# Altium PCB pcb big.PcbDoc (part 1 of 5)
Units mil, origin at the board's own origin, x right, y up, seen from the top; angles counter-clockwise.
Board outline 4068 x 10796 mil, 6 copper layers (TopLayer, MidLayer1, MidLayer2, MidLayer3, MidLayer4, BottomLayer); 521 components, 260 nets, 1284 pads, 1180 vias.
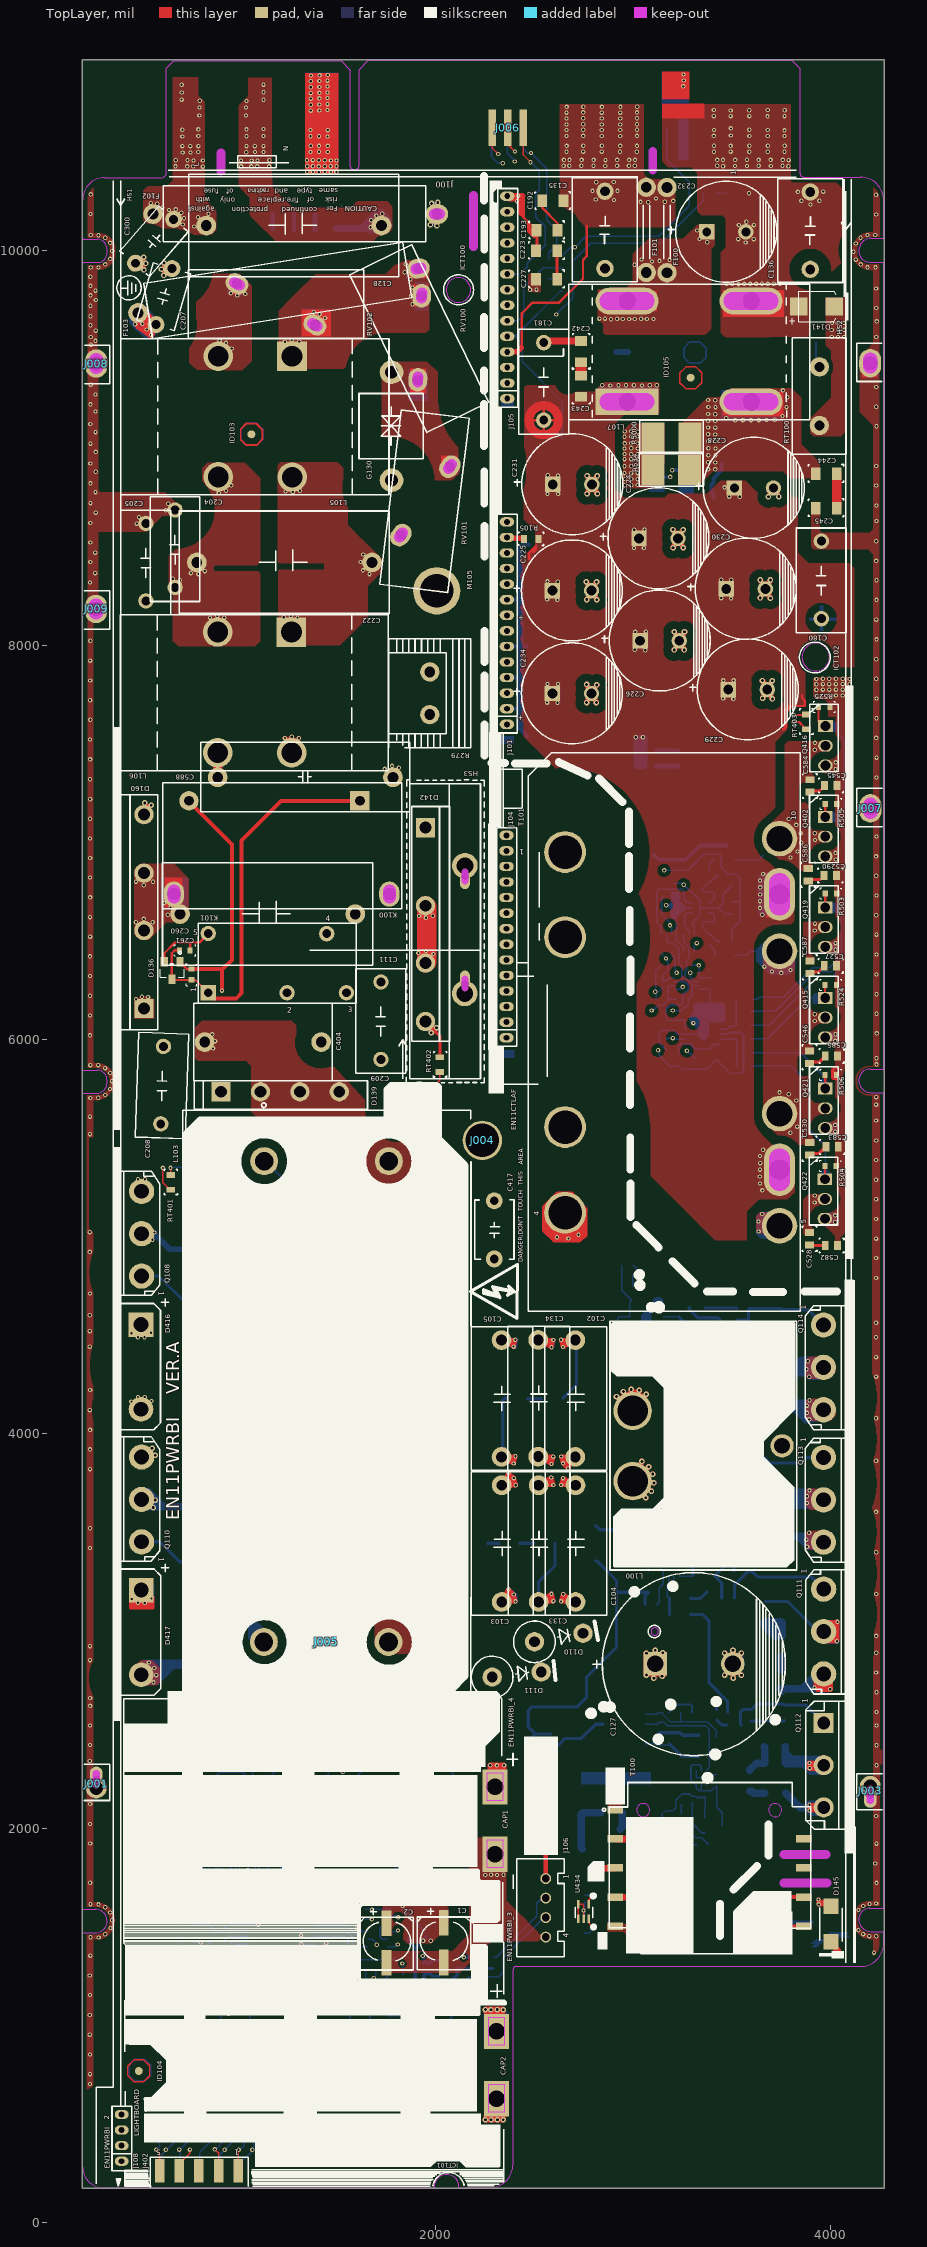
[diagram p0: TopLayer view]
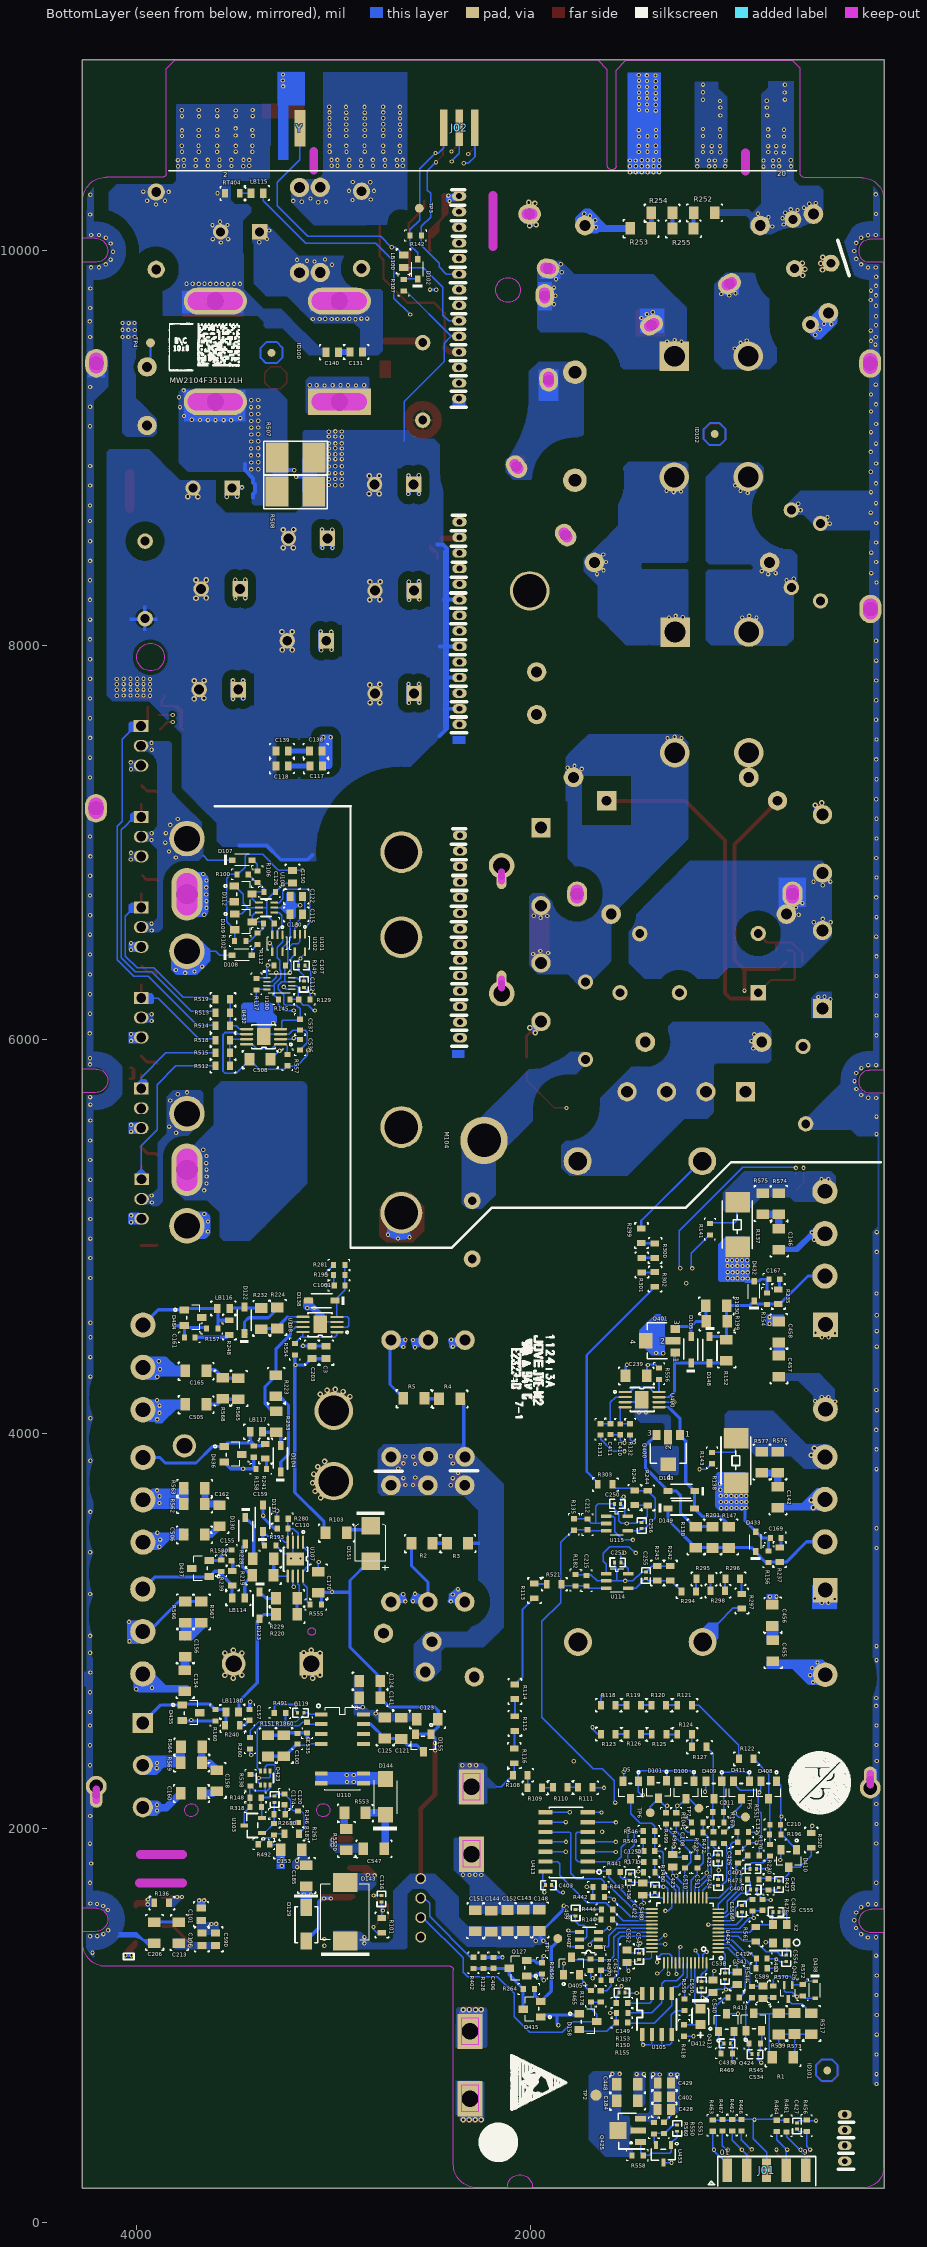
[diagram p1: BottomLayer view, seen from below]
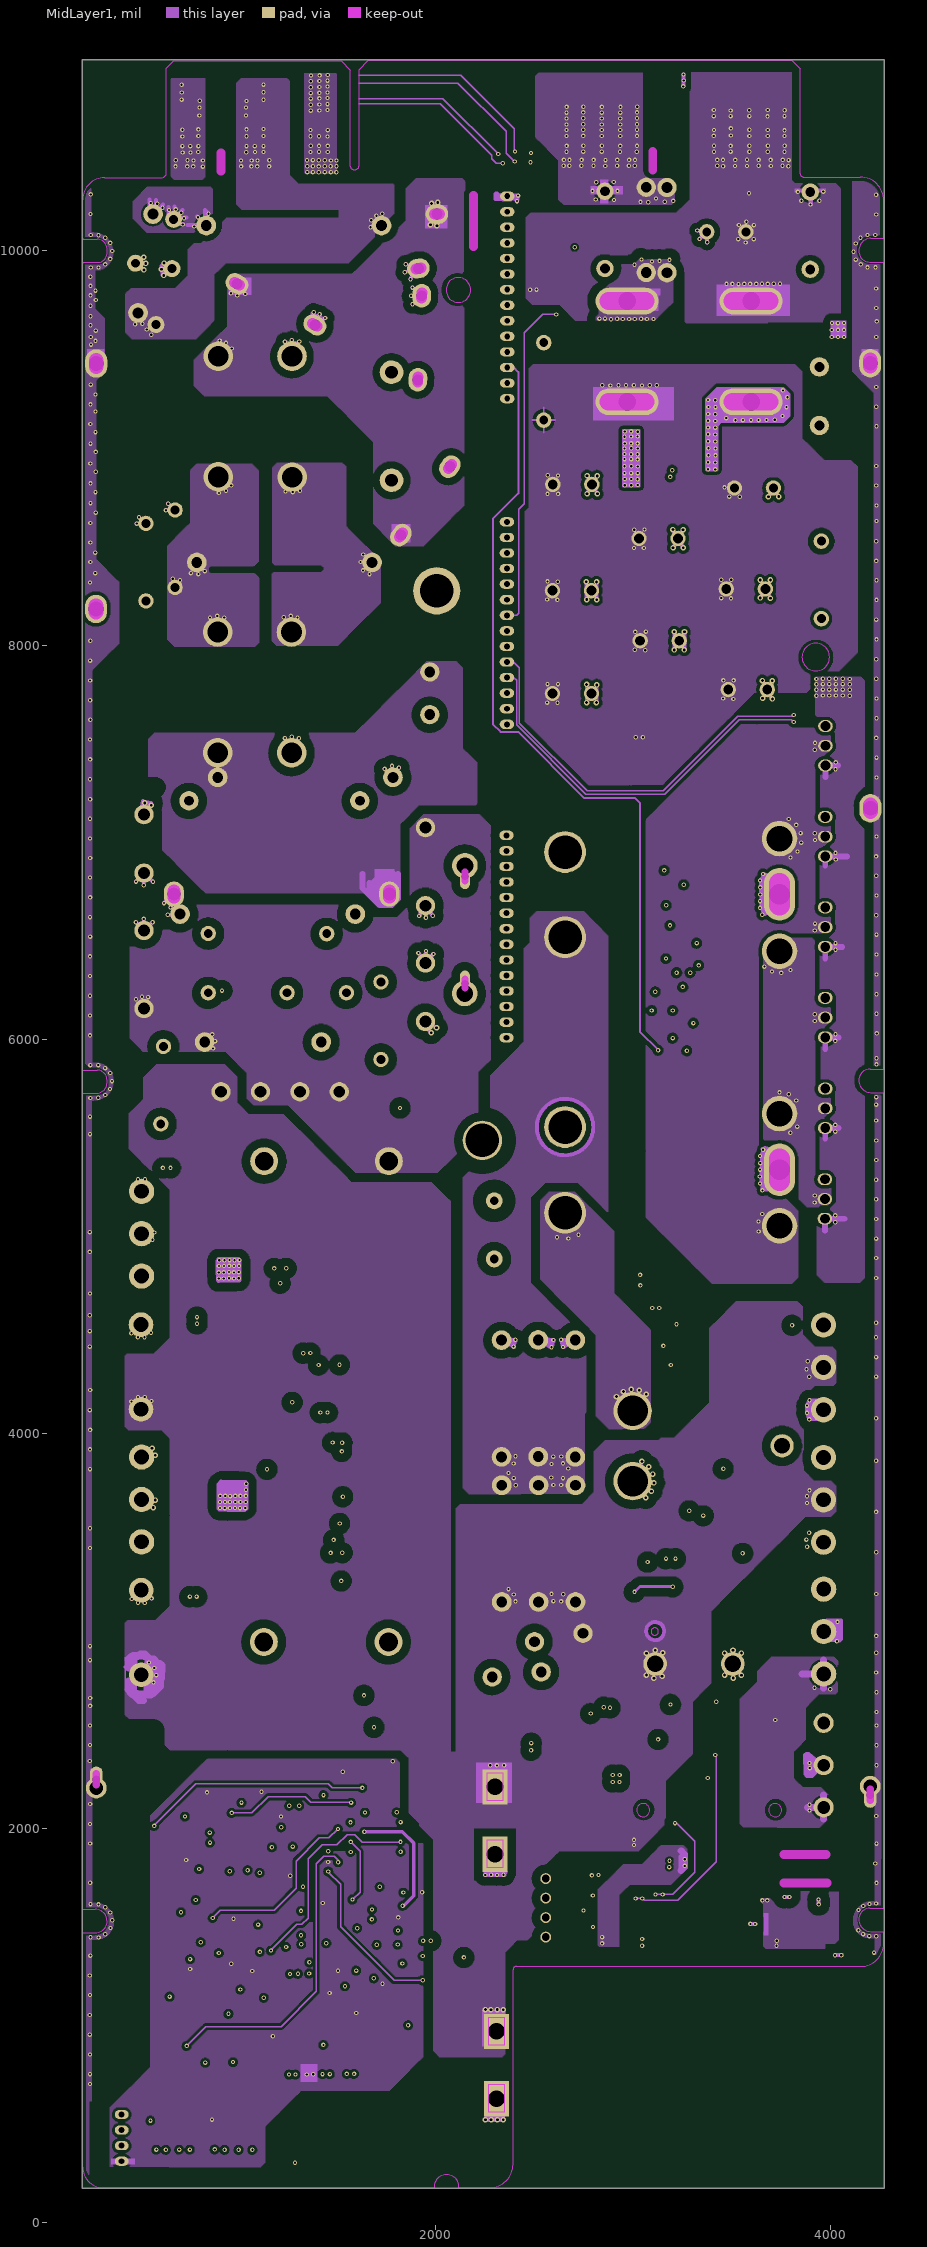
[diagram p2: MidLayer1]
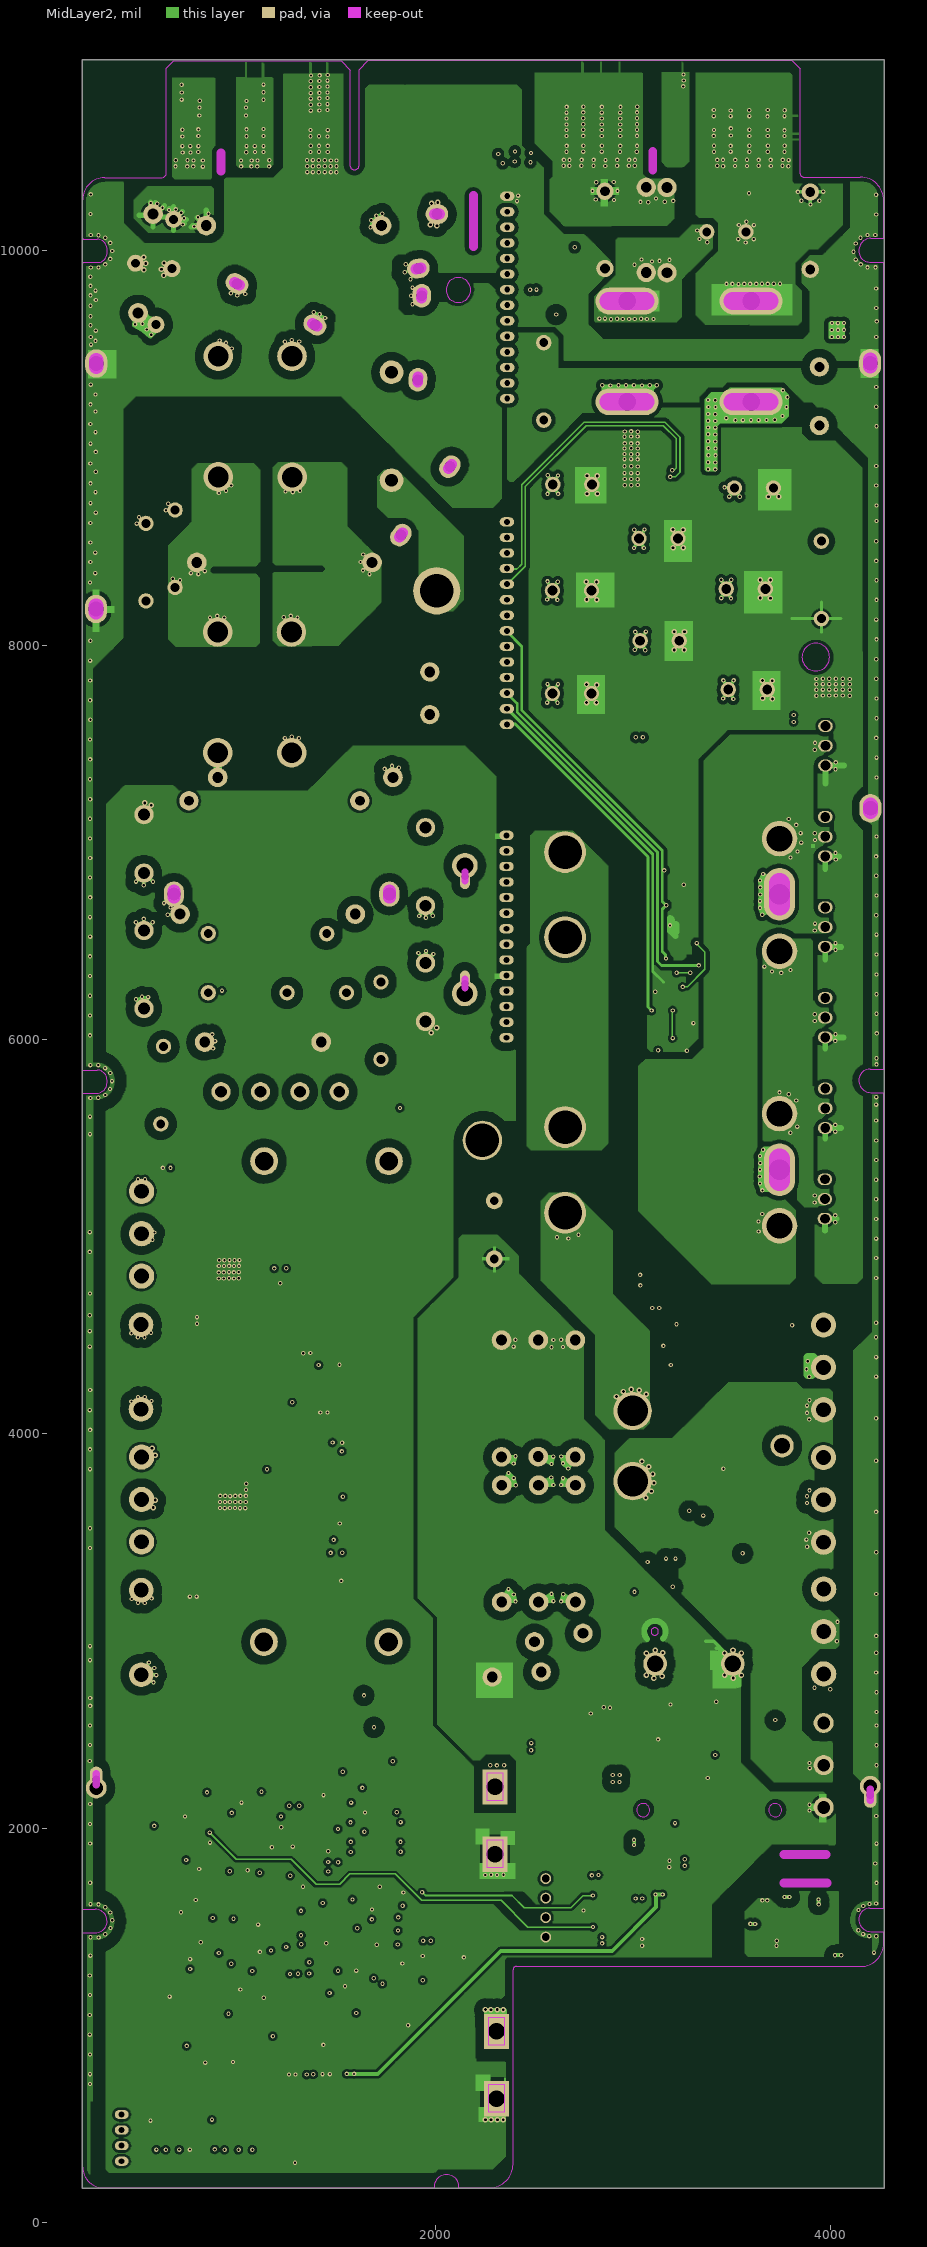
[diagram p3: MidLayer2]
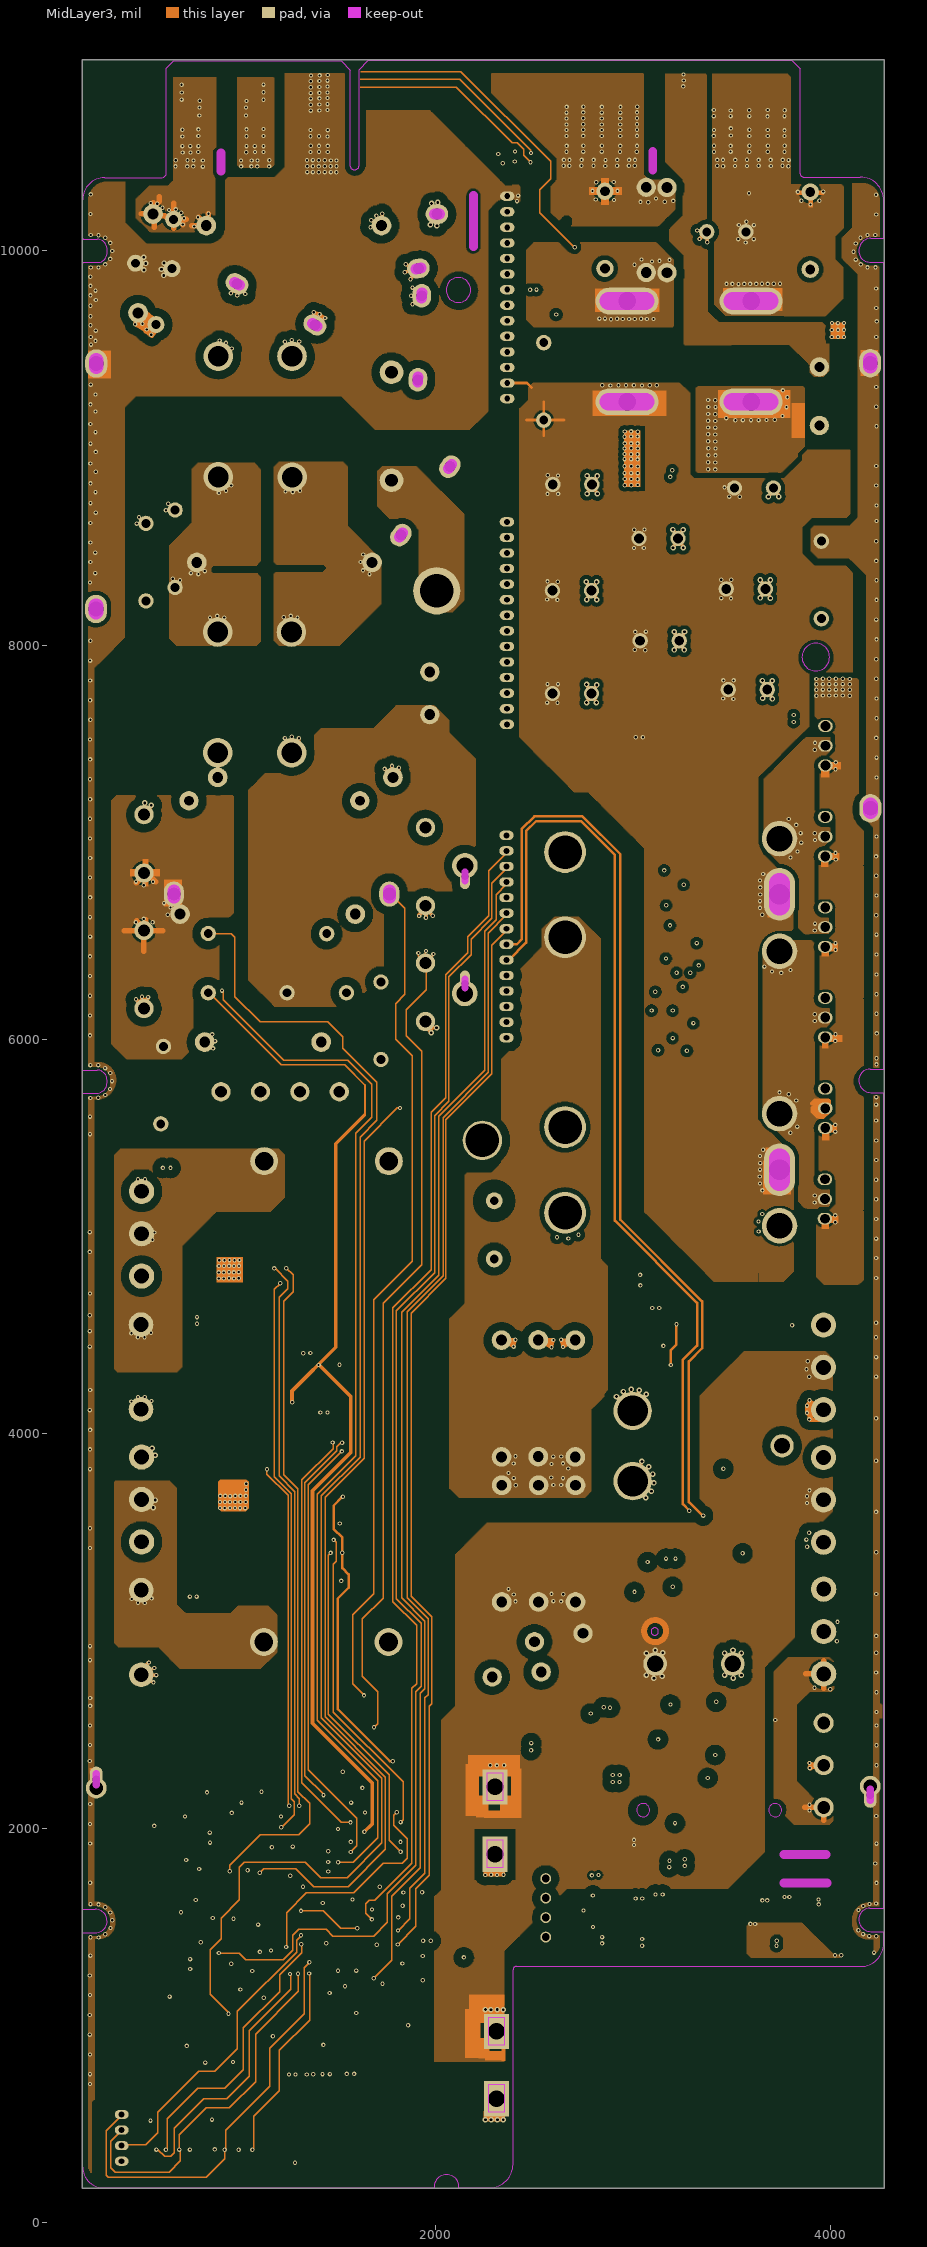
[diagram p4: MidLayer3]
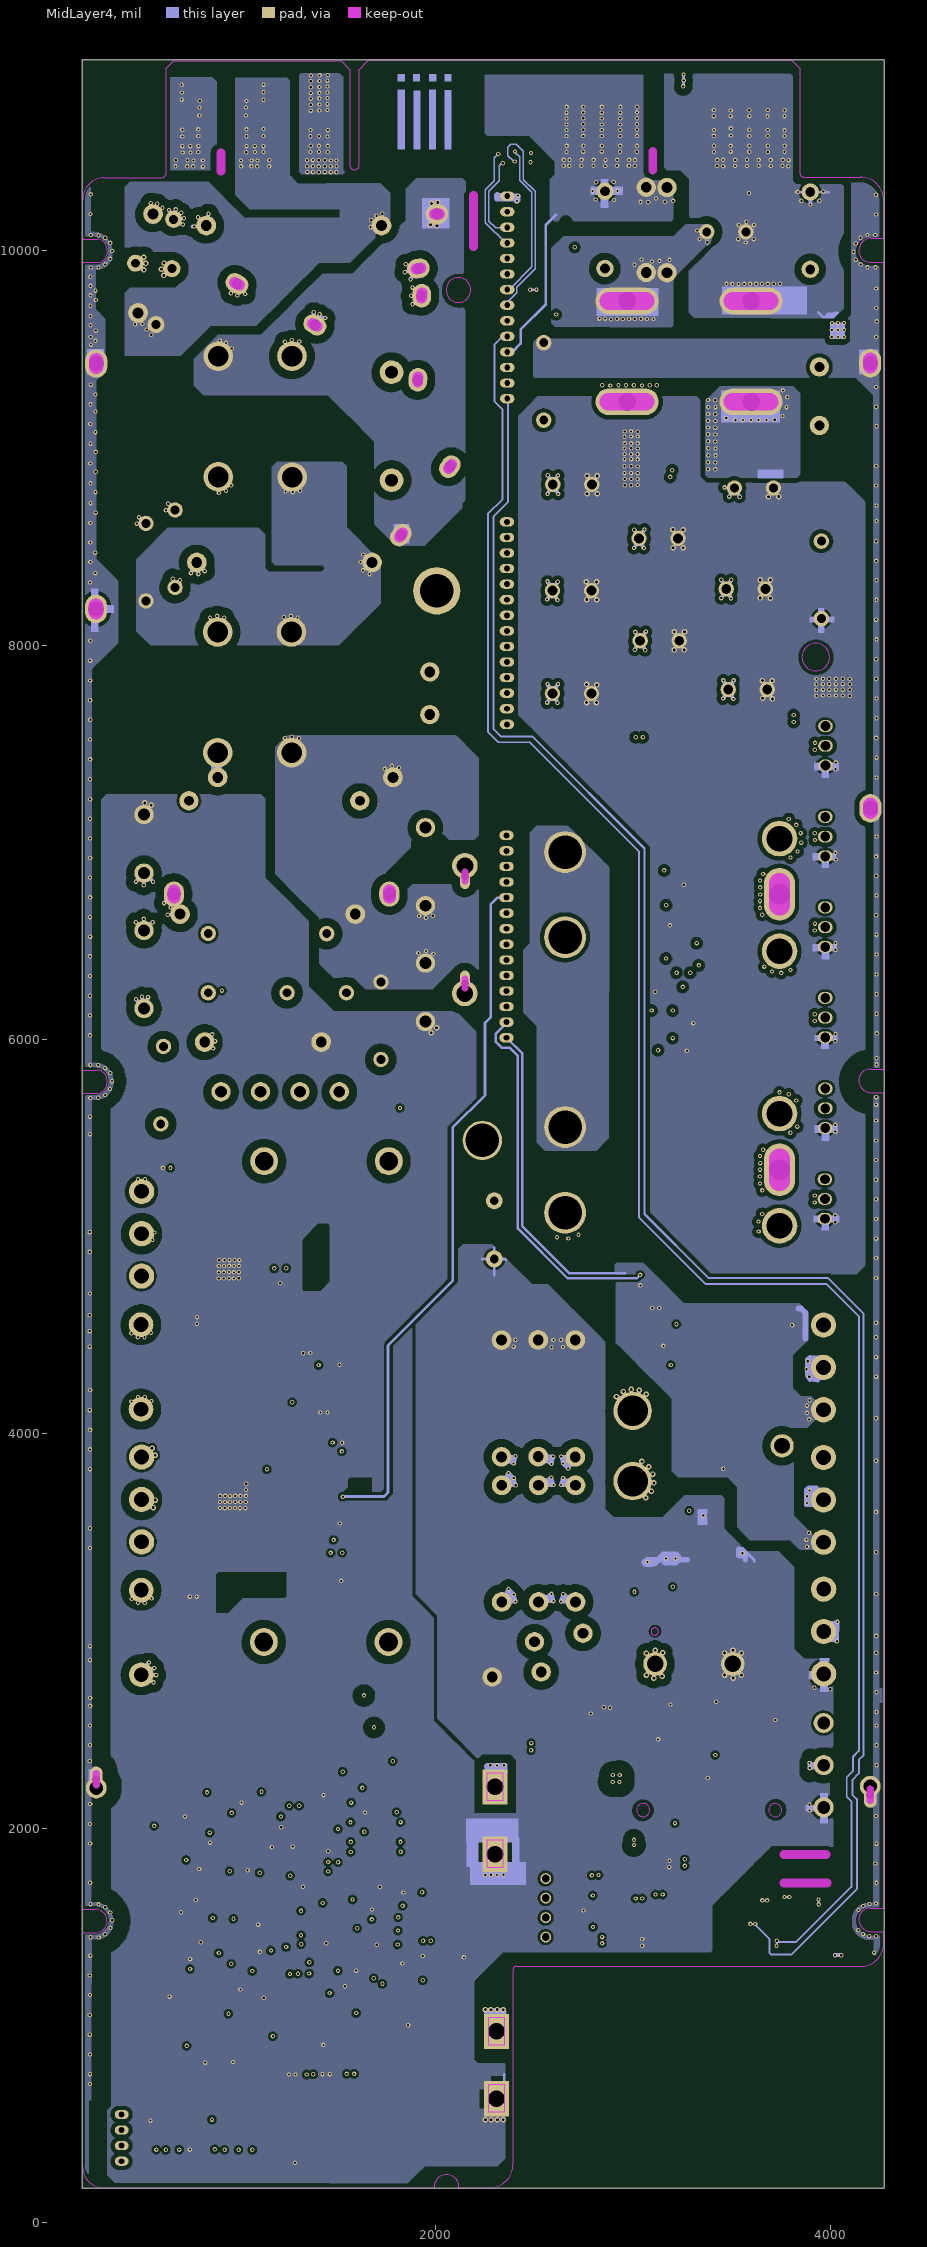
[diagram p5: MidLayer4]

## Layer stack, top to bottom
TopSolder: solder mask 0.4, Solder Resist, Dk 3.5
TopLayer: signal copper 1.4
Dielectric1: core 12.6, FR-4, Dk 4.8
MidLayer1: signal copper 1.4
Dielectric2: prepreg 12.6, FR-4, Dk 4.8
MidLayer2: signal copper 1.4
Dielectric3: core 12.6, FR-4, Dk 4.8
MidLayer3: signal copper 1.4
Dielectric4: prepreg 12.6, FR-4, Dk 4.8
MidLayer4: signal copper 1.4
Dielectric5: core 12.6, FR-4, Dk 4.8
BottomLayer: signal copper 1.4
BottomSolder: solder mask 0.4, Solder Resist, Dk 3.5

## Board outline
205.5,173.5 4273.5,173.5 4273.5,10969.5 205.5,10969.5

## Design rules (kind name [scope] priority, off if disabled: settings)
Clearance Clearance_4 [InNet('C') vs (InPoly)] p1: gap=24 ignorepadtopadclearanceinfootprint=FALSE
Clearance Clearance_3 [InNet('B') vs (InPoly)] p2: gap=12 ignorepadtopadclearanceinfootprint=FALSE
Clearance Clearance_5 [(IsVia) vs (InPoly)] p3 off: gap=12 ignorepadtopadclearanceinfootprint=FALSE
Clearance Clearance_1 [(InPoly) vs (IsKeepOut)] p4: gap=1 ignorepadtopadclearanceinfootprint=FALSE
Clearance [All] p5: gap=20 ignorepadtopadclearanceinfootprint=FALSE
FabricationTestPointUsage TestPointUsage [All] p1: valid=0 allowmultiple=FALSE
FabricationTestpoint Testpoint [All] p1: side=3 testpointundercomponent=TRUE minsize=40 maxsize=100 preferedsize=60 minholesize=20 maxholesize=40 preferedholesize=32 testpointgrid=1 allowsidetop=TRUE allowsidebottom=TRUE usegrid=TRUE gridtolerance=0.01
PolygonConnect [All] p1: connectstyle=Direct reliefconductorwidth=10 reliefentries=4 polygonreliefangle="90 Angle" airgapwidth=10
RoutingLayers [All] p1: top layer_v5=TRUE mid layer 1_v5=FALSE mid layer 2_v5=FALSE mid layer 3_v5=FALSE mid layer 4_v5=FALSE bottom layer_v5=TRUE
RoutingVias [All] p1: holewidth=28 width=50 viastyle="Through Hole" minholewidth=28 minwidth=50 maxholewidth=28 maxwidth=50
SolderMaskExpansion [All] p1: expansion=1 istentingtop=FALSE
Width [All] p1: maxlimit=10 minlimit=10 preferedwidth=10
27 further rules are at their usual default settings.

## Components (designator, comment, footprint, x,y, rotation, side; value= is the part's Value field where it differs from the comment)
C1 "100UF 16V 6.3*5.4MM" SOP2W 2040,1520 r0 top
C2 "100UF 16V 6.3*5.4MM" SOP2W 1750,1518 r0 top
C3 "1UF" 0805W 3037,4444 r270 bottom
C53B "100NF" 0402Q 1014,1265 r0 bottom
C100 "100P" 0603E 3183,2480 r270 bottom
C101 "1UF" 0805W 3671,1595 r270 bottom
C102 "MKP21 104J630" DIP2E 2707,4475 r0 top
C103 "MKP21 104J630" DIP2E 2334,3739 r0 top
C104 "MKP21 104J630" DIP2E 2708,3739 r0 top
C105 "MKP21 104J630" DIP2E 2333,4475 r0 top
C106 "1UF" 0805W 3667,1467 r270 bottom
C107 "100NF" 0402Q 3145,6376 r90 bottom
C108 "1UF" 0603E 1125,1978 r0 bottom
C110 "39P" 0603E 3231,3519 r0 bottom
C111 "MKP62 305-X2 225M" DIP1Y 702,6636 r0 top
C112 "100NF" 0402Q 3150,6297 r0 bottom
C115 "10UF" 0805W 3157,6635 r0 bottom
C116 "100NF" 0402Q 2757,1658 r0 bottom
C117 "470P" 0805W 3056,7387 r0 bottom
C118 "470P" 0805W 3229,7387 r0 bottom
C119 "10P" 0402Q 3150,2585 r90 bottom
C120 "1UF" 0603E 3249,2172 r270 bottom
C121 "10UF" 1206 2656,2559 r270 bottom
C122 "10UF" 0805W 3156,6725 r0 bottom
C123 "10UF" 1206 2471,2552 r0 bottom
C124 "10UF" 1206 2762,2746 r0 bottom
C125 "10UF" 1206 2739,2561 r270 bottom
C126 "220P" 0603R 3294,6749 r0 bottom
C127 "100UF 475V 22*30MM" DIP2V 3112,2833 r0 top
C128 "MKP62 305-X2 225M" DIP1Y 835,10129 r0 top
C130 "220P" 0603E 3300,6589 r0 bottom
C131 "1UF" 0805W 2852,9488 r0 bottom
C132 "1NF" 0603E 895,1928 r0 bottom
C133 "MKP21 104J630" DIP2E 2521,3739 r0 top
C134 "MKP21 104J630" DIP2E 2519,4476 r0 top
C135 "MKP62 275-X2 224M" DIP2Q 2857,10303 r0 top
C136 "MKP62 275-X2 224M" DIP2Q 3899,10299 r0 top
C138 "1UF" 0805W 3058,7464 r0 bottom
C139 "1UF" 0805W 3229,7464 r0 bottom
C140 "1UF" 0805W 2975,9487 r0 bottom
C141 "10UF" 1206 2762,2662 r0 bottom
C142 "100P" 1206 747,3732 r270 bottom
C143 "10UF" 1206 2036,1585 r270 bottom
C144 "10UF" 1206 2200,1581 r270 bottom
C146 "100P" 1206 740,5040 r270 bottom
C148 "10UF" 1206 1955,1585 r270 bottom
C149 "100NF" 0402Q 1520,1165 r90 bottom
C150 "10UF" 0805W 3207,6857 r270 bottom
C151 "10UF" 1206 2280,1583 r270 bottom
C152 "10UF" 1206 2117,1584 r270 bottom
C153 "10UF" 1206 3160,1891 r0 bottom
C154 "1.5NF" 1206 3754,2801 r270 bottom
C155 "1.5NF" 0603E 3516,3410 r270 bottom
C156 "1.5NF" 1206 3752,2976 r270 bottom
C157 "1.5NF" 0603E 3426,2601 r270 bottom
C158 "1.5NF" 1206 3592,2294 r270 bottom
C159 "1.5NF" 0603E 3339,3822 r0 bottom
C160 "1.5NF" 1206 3668,2177 r0 bottom
C161 "1.5NF" 0603E 3702,4489 r0 bottom
C162 "1.5NF" 1206 3578,3638 r270 bottom
C165 "1.5NF" 1206 3644,4319 r0 bottom
C167 "2.2NF" 0603E 736,4784 r0 bottom
C169 "2.2NF" 0603E 729,3472 r0 bottom
C170 "10UF" 1206 3077,3301 r270 bottom
C174 "1NF" 0402Q 3299,2162 r0 bottom
C180 "MKP62 275-X2 104M" DIP2W 3955,8528 r0 top
C181 "MKP62 275-X2 104M" DIP2W 2547,9535 r0 top
C184 "10UF" 1206 1456,617 r0 bottom
C185 "10UF" 1206 3137,1812 r270 bottom
C192 "1NF" 1206 2540,10254 r0 top
C193 "1NF" 1206 2510,10105 r0 top
C203 "1UF" 0805W 3109,4444 r270 bottom
C204 "MKP63 300-Y2 103M" DIP2W 677,8686 r0 top
C205 "MKP63 300-Y2 103M" DIP2W 529,8618 r0 top
C206 "1NF" 1206 3909,1523 r270 bottom
C207 "102M X1:440V Y2:300V" DIP2T 580,9627 r164 top
C208 "MKP63 300-Y2 103M" DIP2W 618,5965 r358 top
C209 "MKP63 300-Y2 103M" DIP2W 1721,6292 r0 top
C210 "100P" 0603E 732,2017 r0 bottom
C211 "100P" 0603E 1022,2082 r0 bottom
C212 "10NF" 0603E 1711,3567 r270 bottom
C213 "1NF" 1206 3784,1522 r270 bottom
C215 "10NF" 0603E 1716,3282 r270 bottom
C222 "AV R.46 MKP X2 1.5UF 275V" DIP1Y 787,8420 r0 top
C223 "1NF" 1206 2508,10002 r0 top
C224 "680UF 63V 13*30MM" DIP2J 3030,8542 r0 top
C225 "680UF 63V 13*30MM" DIP2J 2591,8277 r0 top
C226 "680UF 63V 13*30MM" DIP2J 3036,8023 r0 top
C227 "1NF" 1206 2508,9857 r0 top
C228 "680UF 63V 13*30MM" DIP2K 3514,8798 r0 top
C229 "680UF 63V 13*30MM" DIP2J 3483,7775 r0 top
C230 "680UF 63V 13*30MM" DIP2J 3473,8286 r0 top
C231 "680UF 63V 13*30MM" DIP2J 2593,8816 r0 top
C232 "470UF 63V 13*25MM" DIP2K 3374,10097 r0 top
C234 "680UF 63V 13*30MM" DIP2J 2591,7755 r0 top
C239 "10UF" 1206 1411,4295 r0 bottom
C242 "3.9NF" 1206 2736,9543 r270 top
C243 "3.9NF" 1206 2736,9367 r270 top
C244 "3.9NF" 1206 3926,8870 r0 top
C245 "3.9NF" 1206 3927,8696 r0 top
C250 "100NF" 0402Q 1543,3645 r90 bottom
C251 "100NF" 0402Q 1541,3348 r90 bottom
C255 "10P" 0402Q 1415,3298 r0 bottom
C256 "10P" 0402Q 1437,3551 r0 bottom
C260 "NC" 0603E 699,6452 r0 top
C261 "NC" 0603E 760,6357 r270 top
C300 "102M X1:440V Y2:300V" DIP2T 476,9938 r139 top
C400 "1NF" 0402Q 853,1688 r90 bottom
C401 "1NF" 0402Q 854,1793 r90 bottom
C402 "10UF" 0805R 1288,637 r0 bottom
C403 "100NF" 0402Q 1893,1711 r90 bottom
C404 "CL21X 155K450P" DIP2A 827,5987 r0 top
C405 "1NF" 0402Q 741,1731 r0 bottom
C406 "NC" 0603E 2188,1343 r270 bottom
C410 "100P" 0603E 1545,4049 r270 bottom
C411 "100P" 0603E 1595,4051 r270 bottom
C412 "100P" 0603E 800,1338 r0 bottom
C417 "102M X1:440V Y2:300V" DIP2T 2296,5182 r0 top
C420 "100NF" 0603E 823,1637 r270 bottom
C422 "10UF" 0805W 1431,1722 r270 bottom
C423 "10UF" 0805W 1279,1866 r270 bottom
C424 "1NF" 0402Q 1049,1740 r0 bottom
C425 "1NF" 0402Q 1050,1864 r0 bottom
C426 "1UF" 0603E 948,1877 r270 bottom
C427 "100NF" 0402Q 649,505 r0 bottom
C428 "10UF" 0805R 1288,573 r0 bottom
C429 "10UF" 0805R 1287,706 r0 bottom
C436 "1NF" 0402Q 1495,1766 r0 bottom
C437 "100P" 0603E 1589,1228 r0 bottom
C448 "10UF" 1206 1456,700 r0 bottom
C454 "10P" 0603E 1643,1333 r270 bottom
C455 "1.5NF" 1206 771,2953 r270 bottom
C456 "1.5NF" 1206 773,3132 r270 bottom
C457 "1.5NF" 1206 742,4397 r270 bottom
C458 "1.5NF" 1206 742,4570 r270 bottom
C459 "100NF" 0402Q 1772,1586 r0 bottom
C505 "1.5NF" 1206 3644,4149 r0 bottom
C506 "1.5NF" 1206 3653,3489 r0 bottom
C508 "10UF" 1206 3319,5900 r0 bottom
C510 "470P" 0603E 1217,1851 r270 bottom
C511 "470P" 0603E 1154,1851 r270 bottom
C527 "470P" 0805W 3970,6374 r0 top
C528 "470P" 0805W 3895,5021 r270 top
C530 "470P" 0805W 3896,5478 r270 top
C534 "1NF" 0402Q 845,853 r90 bottom
C535 "2.2NF" 0603E 3133,2537 r270 bottom
C536 "9.09K" 0603E 3169,6000 r270 bottom
C537 "9.09K" 0603E 3169,6103 r270 bottom
C540 "10UF" 0805W 1074,1229 r270 bottom
C541 "10UF" 0805W 952,1270 r270 bottom
C545 "470P" 0805W 3972,7289 r0 top
C546 "470P" 0805W 3895,5942 r270 top
C547 "1.5NF" 1206 2742,1896 r0 bottom
C549 "100NF" 0402Q 1450,1365 r0 bottom
C550 "100NF" 0402Q 1132,1222 r0 bottom
C551 "100NF" 0402Q 1257,494 r0 bottom
C552 "10UF" 0805W 1511,1381 r270 bottom
C554 "22P" 0402Q 703,1355 r0 bottom
C555 "22P" 0402Q 739,1575 r90 bottom
C582 "470P" 0805W 3975,4955 r0 top
C583 "470P" 0805W 3978,5456 r0 top
C584 "470P" 0805W 3897,7318 r270 top
C585 "470P" 0805W 3975,5917 r0 top
C586 "470P" 0805W 3889,6868 r270 top
C587 "470P" 0805W 3897,6398 r270 top
C588 "MKP62 275-X2 684K" DIP2U 893,7330 r0 top
C589 "NC" 0805W 821,1198 r270 bottom
C590 "1UF" 0805W 3598,1467 r270 bottom
C1001 "39P" 0603E 2942,4752 r0 bottom
C1250 "10NF" 0603E 1370,1884 r0 bottom
C4330 "1NF" 0402Q 987,908 r90 bottom
C5290 "470P" 0805W 3969,6832 r0 top
C5480 "100NF" 0402Q 1370,1704 r0 bottom
C5560 "470NF" 0402Q 928,1607 r0 bottom
CAP1 "390UF 475V 30*45MM" DIP2H 2300,2209 r0 top
CAP2 "390UF 475V 30*45MM" DIP2H 2307,969 r0 top
D5 "A7" SOT-23Q 1452,2237 r180 bottom
D100 "18A" SOT-23Q 1171,2238 r180 bottom
D101 "18A" SOT-23Q 1310,2240 r180 bottom
D102 "JS" SMA2W 2572,9858 r0 bottom
D103 "B3" SMA2T 1167,3710 r270 bottom
D104 "B3" SMA2T 3267,3806 r0 bottom
D105 "B3" SMA2T 1185,4359 r0 bottom
D107 "JS" SMA2W 3513,6910 r90 bottom
D108 "JS" SMA2W 3514,6428 r90 bottom
D109 "A7" SOT-23Q 3501,6637 r90 bottom
D110 "UF5408G" DIP2R 2746,2988 r0 top
D111 "UF5408G" DIP2R 2534,2792 r356 top
D112 "A7" SOT-23Q 3502,6779 r90 bottom
D122 "B3" SMA2T 3450,4508 r0 bottom
D123 "B3" SMA2T 3374,3197 r180 bottom
D129 "SS510A" SMA2E 3138,1597 r0 bottom
D130 "B3" SMA2T 3447,3576 r180 bottom
D136 "A4" SOT-23Q 702,6394 r0 top
D137 "S5" SMA2T 3358,3504 r0 bottom
D138 "S5" SMA2T 2991,4677 r270 bottom
D139 "GBU15K" DIP4E 910,5735 r0 top
D141 "SMBJ58A" SMA2Q 4021,9718 r0 top
D142 "D25SB80" DIP4Y 1947,7075 r0 top
D143 "560JS" SMA2U 2939,1427 r0 bottom
D144 "HF7" SMA2I 2735,2068 r0 bottom
D145 "HF7" SOP2E 4003,1424 r0 top
D148 "NC" SMA2T 1092,4493 r180 bottom
D149 "NC" SMA2T 1303,3622 r90 bottom
D151 "U1J" SMA2Q 2810,3534 r90 bottom
D155 "A4" SOT-23Q 2504,2477 r180 bottom
D158 "A7" SOT-23Q 1753,1058 r90 bottom
D160 "D35SB100" DIP4Y 519,6157 r180 top
D405 "A7" SOT-23Q 1832,1255 r0 bottom
D408 "A7" SOT-23Q 752,2237 r180 bottom
D409 "A7" SOT-23Q 1030,2237 r180 bottom
D410 "A7" SOT-23Q 650,1891 r180 bottom
D411 "A7" SOT-23Q 890,2237 r180 bottom
D412 "G黄绿色" SMA2Y 1137,1083 r0 bottom
D415 "A7" SOT-23Q 1948,1041 r270 bottom
D416 "STTH30L06WH" DIP2G 504,4554 r0 top
D417 "STTH30L06WH" DIP2G 505,3207 r0 top
D432 "JS" SMA2W 865,4674 r0 bottom
D433 "JS" SMA2W 857,3403 r0 bottom
D434 "12M" SOT-23Q 3756,4629 r90 bottom
D435 "12M" SOT-23Q 3767,2625 r90 bottom
D436 "12M" SOT-23Q 3554,3936 r90 bottom
D437 "12M" SOT-23Q 3629,3277 r270 bottom
D438 "NC" SMA2O 556,1224 r0 bottom
F100 "A" DIP2L 3172,10322 r0 top
F101 "A" DIP2L 3067,10323 r0 top
F102 "30A250V" DIP2I 565,10187 r0 top
F103 "30A250V" DIP2I 489,9686 r9 top
G130 "2R1500" DIP2D 1775,9385 r0 top
HS2 "" DIP1Q 4203,9431 r180 top
HS3 "38*9*31MM" DIP4U 2147,6882 r0 top
ID100 "" SOP1Q 3314,9483 r90 bottom
ID101 "" SOP1Q 495,770 r90 bottom
ID102 "" SOP1Q 1066,9072 r90 bottom
ID103 "" SOP1Q 1064,9070 r0 top
ID104 "" SOP1Q 493,768 r0 top
ID105 "" SOP1Q 3292,9357 r0 top
J001 "" DIP1W 277,2203 r0 top
J01 "NC" SOP5W 603,264 r0 bottom
J02 "NC" SOP3W 2441,10624 r180 bottom
J003 "" DIP1W 4203,2212 r180 top
J004 "" DIP1R 2236,5488 r0 top
J005 "" DIP2X 1127,2944 r0 top
J006 "NC" SOP3W 2444,10625 r180 top
J007 "" DIP1Q 4204,7173 r180 top
J008 "" DIP1Q 277,9429 r0 top
J009 "" DIP1Q 276,8184 r0 top
J101 "NC" DIP14Q 2360,7599 r0 top
J104 "NC" DIP14Q 2358,6009 r0 top
J105 "NC" DIP14Q 2362,9251 r0 top
J106 "XH2.54MM" DIP4P 2557,1744 r0 top
J108 "MK" DIP4W 406,310 r0 top
J402 "NC" SOP5Q 998,261 r0 top
K100 "HF161F-W 12-HT(704)" DIP4R 1614,7211 r0 top
K101 "HF33F 012-ZS3" DIP5Q 845,6237 r0 top
L100 "BYQ" DIP3Q 2998,4116 r0 top
L103 "BYQ" DIP2X 1129,5383 r0 top
L105 "2MH" DIP4Q 1270,9466 r0 top
L106 "2MH" DIP4Q 1267,8067 r0 top
L107 "270UH" DIP4I 2970,9235 r0 top
LB100 "1UH" 0805W 2643,9979 r270 bottom
LB114 "0R" 0805W 3450,3167 r0 bottom
LB115 "1UH" 0805W 3356,10293 r0 bottom
LB116 "0R" 0805W 3526,4636 r0 bottom
LB117 "0R" 0805W 3359,4011 r0 bottom
LB1180 "0R" 0805W 3481,2589 r0 bottom
M105 "A" DIP1E 2004,8276 r180 top
Q108 "CRJQ41N65GCF" DIP3E 507,4800 r180 top
Q110 "CRJQ41N65GCF" DIP3E 507,3452 r180 top
Q111 "OSG65R038HZ" DIP3E 3967,3212 r0 top
Q112 "OSG65R038HZ" DIP3W 3967,2533 r0 top
Q113 "OSG65R038HZ" DIP3E 3966,3880 r0 top
Q114 "OSG65R038HZ" DIP3E 3966,4552 r0 top
Q127 "2X" SOT-23Q 2019,1249 r270 bottom
Q400 "NC" SOP4W 1242,3994 r270 bottom
Q401 "NC" SOP4W 1266,4412 r0 bottom
Q402 "P157R5NT" DIP3R 3975,7129 r0 top
Q413 "2X" SOT-23Q 1047,968 r0 bottom
Q415 "P157R5NT" DIP3R 3975,6211 r0 top
Q416 "P157R5NT" DIP3R 3976,7590 r0 top
Q419 "P157R5NT" DIP3R 3975,6670 r0 top
Q421 "P157R5NT" DIP3R 3975,5751 r0 top
Q422 "P157R5NT" DIP3R 3973,5291 r0 top
Q423 "1F" SOP6E 3321,2290 r0 bottom
Q424 "2X" SOT-23Q 908,971 r0 bottom
Q425 "KZ" SOP4E 1442,407 r0 bottom
Q426 "NC" SOT-23R 673,1203 r0 bottom
R1 "NC" 1206 667,837 r0 bottom
R2 "NC" 1206 2497,3445 r0 bottom
R3 "NC" 1206 2317,3445 r0 bottom
R4 "NC" 1206 2357,4178 r0 bottom
R5 "NC" 1206 2538,4180 r0 bottom
R100 "2.49K" 0603R 3432,6838 r0 bottom
R101 "NC" 0805Q 2755,1543 r180 bottom
R102 "2.49K" 0603R 3443,6499 r0 bottom
R103 "1R" 1206 2933,3498 r0 bottom
R104 "1.96K" 0603R 1126,2029 r0 bottom
R105 "43R" 0805Q 2447,8539 r90 top
R106 "100R" 0603R 3386,6855 r270 bottom
R107 "220K" 0603R 2643,9855 r270 bottom
R108 "330K" 0805Q 2015,2269 r270 bottom
R109 "330K" 0805Q 1941,2204 r270 bottom
R110 "330K" 0805Q 1813,2206 r270 bottom
R111 "330K" 0805Q 1685,2206 r270 bottom
R112 "100R" 0603R 3386,6540 r270 bottom
R113 "330K" 0805Q 1981,3240 r180 bottom
R114 "330K" 0805Q 2080,2729 r180 bottom
R115 "330K" 0805Q 2081,2567 r180 bottom
R116 "330K" 0805Q 2083,2403 r180 bottom
R117 "10K" 0603R 3391,6310 r270 bottom
R118 "330K" 0805Q 1569,2624 r270 bottom
R119 "330K" 0805Q 1440,2624 r270 bottom
R120 "330K" 0805Q 1312,2624 r270 bottom
R121 "330K" 0805Q 1182,2624 r270 bottom
R122 "330K" 0805Q 869,2352 r270 bottom
R123 "330K" 0805Q 1569,2477 r270 bottom
R124 "330K" 0805Q 1182,2476 r270 bottom
R125 "330K" 0805Q 1311,2475 r270 bottom
R126 "330K" 0805Q 1439,2476 r270 bottom
R127 "330K" 0805Q 1107,2412 r270 bottom
R128 "10K" 0603R 2239,1345 r270 bottom
R129 "10K" 0603R 3118,6204 r0 bottom
R130 "18R" 1206 1162,3529 r270 bottom
R131 "100R" 0603R 1645,4051 r270 bottom
R132 "100R" 0603R 1495,4051 r270 bottom
R135 "9.09K" 0603R 1780,3569 r270 bottom
R136 "2.2R" 0805Q 3835,1620 r270 bottom
R137 "5MRF" SOP2R 950,5174 r0 bottom
R138 "5MRF" SOP2R 957,3977 r0 bottom
R141 "100R" 0603R 1090,5067 r270 bottom
R142 "NC" 0603R 2553,10078 r0 bottom
R143 "100R" 0603R 1080,3906 r270 bottom
R144 "NC" 0603R 1584,1537 r0 bottom
R145 "NC" 0603R 3221,6204 r0 bottom
R146 "18K" 0603R 3180,2086 r270 bottom
R147 "9.1R" 1206 994,3528 r270 bottom
R148 "NC" 0603R 3366,2154 r0 bottom
R149 "NC" 0603R 3243,6375 r0 bottom
R150 "10K" 0603R 1506,1061 r0 bottom
R151 "2.7R" 1206 3332,2470 r270 bottom
R152 "9.1R" 1206 1007,4477 r270 bottom
R153 "10K" 0603R 1507,1113 r0 bottom
R154 "22.1K" 0603R 800,4714 r270 bottom
R155 "10K" 0603R 1507,1013 r0 bottom
R156 "22.1K" 0603R 793,3405 r270 bottom
R157 "51K" 0603R 3586,4534 r0 bottom
R158 "51K" 0603R 3404,3939 r270 bottom
R160 "51K" 0603R 3599,2601 r270 bottom
R167 "10K" 0603R 1019,2028 r0 bottom
R170 "1.96K" 0603R 840,1861 r0 bottom
R171 "4.64K" 0603R 1368,1827 r0 bottom
R178 "820R" 0603R 1644,1175 r270 bottom
R182 "150K" 0603R 1772,3286 r270 bottom
R187 "7.5K" 0603R 3301,2023 r270 bottom
R193 "2.15K" 0603R 3292,3433 r0 bottom
R195 "2.15K" 0603R 2941,4805 r0 bottom
R196 "10K" 0603R 729,1968 r0 bottom
R199 "4.7R" 1206 1002,4570 r0 bottom
R201 "4.7R" 1206 1077,3528 r270 bottom
R219 "4.7R" 1206 3304,3282 r0 bottom
R220 "4.7R" 1206 3184,3084 r0 bottom
R222 "10K" 0603R 1072,1981 r270 bottom
R223 "2.7R" 1206 3292,4297 r270 bottom
R224 "2.7R" 1206 3285,4641 r270 bottom
R228 "2.7R" 1206 3303,3366 r0 bottom
R229 "2.7R" 1206 3184,3166 r0 bottom
R230 "10K" 0603R 786,1916 r270 bottom
R232 "4.7R" 1206 3365,4638 r270 bottom
R233 "4.7R" 1206 3290,4115 r270 bottom
R235 "4.7R" 0805Q 743,4733 r180 bottom
R237 "4.7R" 0805Q 737,3423 r180 bottom
R239 "43R" 0805Q 3512,3304 r180 bottom
R240 "43R" 0805Q 3475,2522 r270 bottom
R241 "43R" 0805Q 3345,3948 r180 bottom
R242 "3.32K" 0805Q 1291,3329 r180 bottom
R243 "68K" 0805Q 1357,3330 r180 bottom
R244 "3.32K" 0805Q 1406,3711 r180 bottom
R245 "68K" 0805Q 1472,3713 r180 bottom
R248 "43R" 0805Q 3529,4576 r180 bottom
R252 "200K" 1206 1065,10195 r0 bottom
R253 "200K" 1206 1387,10115 r0 bottom
R254 "200K" 1206 1280,10194 r0 bottom
R255 "200K" 1206 1173,10114 r0 bottom
R260 "33.2K" 0603R 3423,2460 r270 bottom
R261 "24.9K" 0805Q 3175,1971 r270 bottom
R264 "22.1K" 0603R 1979,1183 r0 bottom
R279 "5W75RJ" DIP2F 1969,7648 r0 top
R280 "1.96K" 0603R 3229,3569 r0 bottom
R281 "1.96K" 0603R 2942,4856 r0 bottom
R294 "100K" 0805Q 1160,3200 r270 bottom
R295 "100K" 0805Q 1084,3264 r270 bottom
R296 "100K" 0805Q 938,3265 r270 bottom
R297 "100K" 0805Q 929,3188 r180 bottom
R298 "100K" 0805Q 1014,3203 r270 bottom
R299 "100K" 0805Q 1438,5041 r180 bottom
R300 "100K" 0805Q 1369,4966 r180 bottom
R301 "100K" 0805Q 1436,4892 r180 bottom
R302 "100K" 0805Q 1369,4820 r180 bottom
R303 "100K" 0805Q 1585,3743 r270 bottom
R318 "5.1K" 0603R 3365,2106 r0 bottom
R402 "402R" 0603R 2290,1345 r270 bottom
R403 "10K" 0603R 799,1289 r0 bottom
R413 "1.96K" 0603R 941,1140 r0 bottom
R418 "10K" 0603R 1221,1002 r270 bottom
R427 "10K" 0603R 793,1743 r270 bottom
R441 "5.1K" 0603R 1545,1778 r0 bottom
R442 "5.1K" 0603R 1625,1650 r0 bottom
R443 "5.1K" 0603R 1626,1701 r0 bottom
R444 "5.1K" 0603R 1583,1587 r0 bottom
R456 "1.96K" 0603R 599,519 r270 bottom
R461 "10K" 0603R 701,517 r270 bottom
R462 "10K" 0603R 977,522 r270 bottom
R463 "10K" 0603R 1076,520 r270 bottom
R464 "10K" 0603R 751,518 r270 bottom
R465 "10K" 0603R 1693,1176 r270 bottom
R466 "10K" 0603R 930,521 r270 bottom
R467 "10K" 0603R 1027,521 r270 bottom
R469 "1.96K" 0603R 976,857 r0 bottom
R472 "10K" 0603R 1018,1980 r270 bottom
R473 "10K" 0603R 841,1740 r0 bottom
R475 "4.64K" 0603R 874,1638 r270 bottom
R491 "8.45K" 0603R 3242,2584 r0 bottom
R492 "0R" 0603R 3323,1918 r0 bottom
R496 "2.49K" 0603R 1261,2078 r270 bottom
R499 "2.49K" 0603R 1313,2078 r270 bottom
R503 "51K" 0603R 3975,6740 r0 top
R504 "51K" 0603R 3973,5358 r0 top
R505 "51K" 0603R 3975,7195 r0 top
R506 "51K" 0603R 3974,5821 r0 top
R507 "1L00" SOP2Q 3099,8953 r0 bottom
R508 "1L00" SOP2Q 3100,8781 r0 bottom
R512 "4.7R" 0805Q 3524,5866 r270 bottom
R513 "4.7R" 0805Q 3525,6137 r270 bottom
R514 "4.7R" 0805Q 3524,6070 r270 bottom
R515 "4.7R" 0805Q 3524,5932 r270 bottom
R517 "NC" 1206 576,1061 r270 bottom
R518 "4.7R" 0805Q 3525,5997 r270 bottom
R519 "4.7R" 0805Q 3525,6204 r270 bottom
R520 "330K" 0805Q 577,1974 r180 bottom
R521 "330K" 0805Q 1844,3238 r270 bottom
R524 "51K" 0603R 3974,6277 r0 top
R525 "51K" 0603R 3941,7687 r0 top
R534 "0.001R" SOP2Q 3101,8889 r0 top
R538 "432R" 0603R 3421,2271 r270 bottom
R539 "18R" 1206 742,1060 r270 bottom
R544 "1.96K" 0603R 876,1197 r270 bottom
R545 "1.96K" 0603R 833,907 r0 bottom
R546 "10K" 0603R 1370,1985 r0 bottom
R549 "3.01K" 0603R 1370,1935 r0 bottom
R550 "9.09K" 0603R 1324,508 r270 bottom
R551 "1K" 0603R 894,1980 r0 bottom
R553 "51K" 1206 2837,2077 r0 bottom
R554 "NC" 0603R 3195,4458 r270 bottom
R555 "NC" 0603R 3060,3134 r0 bottom
R556 "NC" 0603R 1348,4334 r270 bottom
R557 "NC" 0603R 3233,5925 r270 bottom
R558 "402R" 0603R 1428,340 r0 bottom
R559 "10K" 0603R 1219,1132 r270 bottom
R560 "3.01K" 0603R 1373,507 r270 bottom
R561 "NC" 0805Q 858,1499 r180 bottom
R562 "2.2R" 1206 3652,3644 r0 bottom
R563 "2.2R" 1206 3652,3724 r0 bottom
R564 "2.2R" 1206 3666,2412 r0 bottom
R565 "2.2R" 1206 3482,4282 r270 bottom
R566 "2.2R" 1206 3752,3149 r270 bottom
R567 "2.2R" 1206 3671,3149 r270 bottom
R568 "2.2R" 1206 3562,4284 r270 bottom
R569 "2.2R" 1206 3667,2332 r0 bottom
R570 "NC" 0603R 769,1198 r270 bottom
R572 "NC" 0603R 619,1207 r270 bottom
R573 "18R" 1206 661,1062 r270 bottom
R574 "2.2R" 1206 742,5220 r270 bottom
R575 "2.2R" 1206 823,5220 r270 bottom
R576 "2.2R" 1206 747,3909 r270 bottom
R577 "2.2R" 1206 827,3909 r270 bottom
R1480 "1.96K" 0603R 1369,1776 r0 bottom
R1580 "51K" 0603R 3569,3359 r270 bottom
R1860 "4.7R" 1206 3252,2471 r270 bottom
R1930 "18R" 1206 1004,4650 r0 bottom
R2630 "1K" 0603R 3244,2070 r0 bottom
R2650 "4.64K" 0603R 1941,1317 r270 bottom
R4870 "402R" 0603R 1695,1336 r270 bottom
R5000 "0.001R" SOP2Q 3102,9053 r0 top
R5520 "51K" 1206 2935,1995 r270 bottom
RT100 "NTC 1D-15" DIP2Z 3945,9412 r0 top
RT401 "47K" 0805Q 654,5312 r0 top
RT402 "47K" 0805Q 2020,5910 r0 top
RT403 "47K" 0805Q 3878,7648 r0 top
RT404 "33K" 0805Q 3475,10292 r270 bottom
RV100 "S20K460K1" DIP2P 1928,9773 r33 top
RV101 "S20K460K1" DIP2P 2071,8906 r0 top
RV102 "S20K460K1" DIP2O 991,9834 r0 top
T100 "BYQ" SOP9Q 2910,2094 r0 top
T101 "BYQ" DIP10Q 2655,6951 r0 top
TP1 "" SOP1E 1862,1440 r0 bottom
TP2 "" SOP1R 1668,645 r0 bottom
TP3 "" SOP1E 2564,10217 r0 bottom
TP4 "" SOP1E 3928,9534 r0 bottom
TP5 "" SOP1E 910,2056 r0 bottom
TP6 "" SOP1E 1393,2078 r0 bottom
TP7 "" SOP1E 1146,2101 r0 bottom
U100 "2G08" SOP8Y 3337,6313 r0 bottom
U101 "R57LF" SOT23-5W 3144,6533 r0 bottom
U102 "R57LF" SOT23-5W 3258,6532 r0 bottom
U103 "CY6ND" SOT-23W 3363,1975 r90 bottom
U104 "R55LF" SOP6Q 3378,6694 r0 bottom
U105 "NC" SOP8Q 1434,952 r0 bottom
U107 "JW87524" SOP8E 3154,3450 r270 bottom
U108 "JW87524" SOP8E 2982,4516 r0 bottom
U110 "PN8149W" SOP12Q 3062,2577 r0 bottom
U114 "961K1" SOT23-5T 1616,3291 r0 bottom
U115 "961K1" SOT23-5T 1617,3582 r0 bottom
U400 "JW87524" SOP8E 1520,4212 r180 bottom
U402 "R53LG" SOP6W 1655,1397 r0 bottom
U413 "74LVC08AD" SOP16Q 1710,1780 r0 bottom
U424 "STM32F334C8T7" QFP48Q 1048,1372 r0 bottom
U432 "JW87524" SOP8E 3268,5976 r0 bottom
U433 "CY6ND" SOT-23W 1288,392 r0 bottom
U434 "BP0L" SOT23-5Q 2723,1540 r0 top
X2 "NC" SMD4Q 701,1417 r0 bottom
Y "" SOP1P 3170,10623 r180 bottom

## Footprints (in the part's own frame and the unit in brackets; to place one, negate y for a bottom-side part, rotate by r counter-clockwise, add the part's x,y. Pads: shape width x height; smd on the part's side, far side on the other; paste and mask are expansions set on the pad)
0402Q [mil]
  rect 20x15 smd: 1(0,0) 2(0,32)
  silkscreen extent -23,-22 22,56
0603E [mil]
  rect 26x30 smd: 1(0,0) 2(54,0)
  silkscreen extent -27,-28 83,28
0603R [mil]
  rect 26x31 smd: 1(0,0) 2(58,0)
  silkscreen extent -26,-27 84,29
0805Q [mil]
  rect 43x30 smd: 1(0,0) 2(0,-74)
  silkscreen extent -33,-100 35,29
0805R [mil]
  rect 40x55 smd: 1(0,0) 2(68,0)
  silkscreen extent -30,-35 98,41
0805W [mil]
  rect 35x47 smd: 1(0,0) 2(63,0)
  silkscreen extent -31,-37 95,38
1206 [mil]
  rect 49x63 smd: 1(0,0) 2(107,0)
  silkscreen extent -38,-43 142,47
DIP1E [mil]
  round 240 / inner round 240 / far side round 200 hole 170: 1(0,0)
DIP1Q [mil]
  oval 112x144 hole 75: 1(0,0)
  KeepOutLayer lines w75: 0,16 0,0 0,-16
  silkscreen extent -59,-102 69,93
DIP1R [mil]
  round 200 / inner round 200 / far side round 240 hole 170: 1(0,0)
DIP1W [mil]
  round 106 hole 70: 1(0,0)
  oval 65x130 hole 40: 2(0,44)
  KeepOutLayer lines w40: 0,17 0,44 0,71
  silkscreen extent -61,-63 68,120
DIP1Y [mil]
  round 100 hole 55: 1(0,0) 2(889,0)
  silkscreen extent -89,-259 977,261
DIP2A [mil]
  round 100 hole 55: 1(0,0) 2(591,0)
  silkscreen extent -55,-196 647,198
DIP2D [mil]
  round 120 hole 65: 1(0,0) 2(0,-548)
  silkscreen extent -165,-438 160,-108
DIP2E [mil]
  round 100 hole 55: 1(0,0) 2(0,-592)
  silkscreen extent -154,-660 159,69
DIP2F [mil]
  round 98 hole 55: 1(0,0) 2(0,217)
  silkscreen extent -209,-168 208,385
DIP2G [mil]
  rect 125x125 / inner round 125 / far side rect 125x125 hole 75: 1(0,0)
  round 125 hole 75: 2(0,-429)
  silkscreen extent -108,-534 140,131
DIP2H [mil]
  rect 126x178 hole 85: 1(0,0) 2(0,-342)
  KeepOutLayer region: -42,-409 42,-409 42,-272 -42,-272
  KeepOutLayer region: -42,-67 42,-67 42,70 -42,70
DIP2I [mil]
  round 100 hole 55: 1(0,0)
  oval 115x100 hole 55: 2(1440,0)
  KeepOutLayer lines w55: 1427,0 1440,0 1453,0
  silkscreen extent 52,-141 1383,143
DIP2J [mil]
  rect 78x78 / inner round 78 / far side rect 78x78 hole 50: 1(0,0)
  round 78 hole 50: 2(198,0)
  silkscreen extent -195,-255 355,257
DIP2K [mil]
  rect 78x78 / inner round 78 / far side rect 78x78 hole 45: 1(0,0)
  round 78 hole 45: 2(198,0)
  silkscreen extent -195,-255 355,257
DIP2L [mil]
  round 98 hole 55: 1(0,0) 2(0,-432)
  silkscreen extent -16,-361 17,-90
DIP2O [mil]
  oval 95x120 hole 55 rot 59: 1(0,0) 2(395,-209)
  KeepOutLayer lines w55: -12,7 0,0 ; 383,-202 395,-209 ; 0,0 12,-7 0,0 ; 395,-209 407,-216 395,-209
  silkscreen extent -247,-278 643,70
DIP2P [mil]
  oval 95x120 hole 55 rot 144: 1(0,0)
  oval 95x120 hole 55 rot 143: 2(-249,-347)
  KeepOutLayer lines w55: -256,-357 -249,-347 -240,-335 ; -7,-10 0,0 9,12
  silkscreen extent -356,-638 98,287
DIP2Q [mil]
  round 88 hole 50: 1(0,0) 2(0,-392)
  silkscreen extent -166,-459 164,68
DIP2R [mil]
  round 98 hole 55: 1(0,0) 2(-246,-43)
  silkscreen extent -351,-149 76,63
DIP2T [mil]
  round 86 hole 45: 1(0,0) 2(0,-295)
  silkscreen extent -98,-297 100,5
DIP2U [mil]
  round 100 hole 55: 1(0,0) 2(889,0)
  silkscreen extent -85,-175 975,179
DIP2V [mil]
  rect 120x120 / inner round 120 / far side rect 120x120 hole 85: 1(0,0)
  round 120 hole 85: 2(394,0)
  silkscreen extent -317,-465 661,463
DIP2W [mil]
  round 78 hole 45: 1(0,0) 2(0,-393)
  silkscreen extent -127,-464 126,67
DIP2X [mil]
  round 142 hole 95: 1(0,0) 2(632,0)
DIP2Z [mil]
  round 98 hole 50: 1(0,0) 2(0,-297)
  silkscreen extent -138,-444 137,147
DIP3E [mil]
  round 128 hole 75: 1(0,0) 2(0,-215) 3(0,-430)
  silkscreen extent -92,-532 113,98
DIP3Q [mil]
  round 195 hole 155: 1(0,0) 2(0,-356)
  round 118 hole 80: 3(758,-177)
  silkscreen extent -115,-807 833,454
DIP3R [mil]
  rect 74x60 / inner oval 74x60 / far side rect 74x60 hole 50: 1(0,0)
  oval 74x60 hole 50: 2(0,-100) 3(0,-200)
  silkscreen extent -80,-232 65,111
DIP3W [mil]
  rect 102x102 / inner round 102 / far side rect 102x102 hole 65: 1(0,0)
  round 102 hole 65: 2(0,-214) 3(0,-428)
  silkscreen extent -90,-539 115,110
DIP4E [mil]
  rect 98x98 / inner round 98 / far side rect 98x98 hole 60: 1(0,0)
  round 98 hole 60: 2(200,0) 3(400,0) 4(600,0)
  silkscreen extent -136,-89 743,55
DIP4I [mil]
  rect 320x136 / inner oval 320x136 / far side rect 320x136 hole 90: 1(0,0)
  oval 320x136 hole 90: 2(629,0) 3(629,511) 4(0,511)
  KeepOutLayer lines w90: -95,0 0,0 95,0 ; -95,511 0,511 95,511 ; 534,0 629,0 724,0 ; 534,511 629,511 724,511
  silkscreen extent -296,-90 926,597
DIP4P [mil]
  round 55 hole 40: 1(0,0) 2(0,-99) 3(0,-198) 4(0,-297)
  silkscreen extent -147,-397 95,101
DIP4Q [mil]
  rect 150x150 / inner round 150 / far side rect 150x150 hole 105: 1(0,0)
  round 150 hole 105: 2(-374,0) 3(-374,-612) 4(1,-613)
  silkscreen extent -869,-703 492,88
DIP4R [mil]
  rect 98x98 / inner round 98 / far side rect 98x98 hole 50: 1(0,0)
  round 98 hole 50: 2(-867,0)
  oval 103x128 hole 65: 3(-943,-473) 4(150,-473)
  KeepOutLayer lines w65: -943,-489 -943,-473 -943,-457 ; 150,-489 150,-473 150,-457
  silkscreen extent -999,-547 212,91
DIP4U [mil]
  round 130 hole 85: 1(0,0) 2(-1,-648)
  oval 50x130 hole 35: 3(0,-54) 4(0,-597)
  KeepOutLayer lines w35: 0,-620 0,-597 0,-574 ; 0,-77 0,-54 0,-31
  silkscreen extent -297,-1102 99,435
DIP4W [mil]
  oval 70x46 hole 30: 1(0,0) 2(0,79) 3(0,158) 4(0,237)
  silkscreen extent -49,-49 52,278
DIP4Y [mil]
  rect 98x98 / inner round 98 / far side rect 98x98 hole 60: 1(0,0)
  round 98 hole 60: 2(0,-396) 3(0,-687) 4(0,-984)
  silkscreen extent -70,-1084 122,107
DIP5Q [mil]
  rect 78x78 / inner round 78 / far side rect 78x78 hole 45: 1(0,0)
  round 78 hole 45: 2(400,0) 3(701,0) 4(601,300) 5(0,301)
  silkscreen extent -51,-52 751,353
DIP10Q [mil]
  round 212 hole 170: 1(0,0) 2(0,-432) 3(0,-1395) 4(0,-1830)
  round 180 hole 130: 5(1088,-1896) 7(1088,-1327) 8(1088,-503) 10(1088,68)
  oval 157x267 hole 105: 6(1088,-1612) 9(1088,-214)
  KeepOutLayer lines w105: 1088,-1668 1088,-1612 1088,-1556 ; 1088,-270 1088,-214 1088,-158
  silkscreen extent -187,-2329 1193,504
DIP14Q [mil]
  oval 73x47 hole 30: 1(0,0) 2(0,79) 3(0,158) 4(0,237) 5(0,316) 6(0,395) 7(0,474) 8(0,553) 9(0,632) 10(0,711) 11(0,790) 12(0,869) 13(0,948) 14(0,1027)
  silkscreen extent -49,-44 53,1066
QFP48Q [mil]
  oval 59x9 smd: 1(0,0) 2(0,-19.69) 3(0,-39.37) 4(0,-59.06) 5(0,-78.74) 6(0,-98.43) 7(0,-118.11) 8(0,-137.8) 9(0,-157.48) 10(0,-177.17) 11(0,-196.85) 12(0,-216.54) 25(336,-217) 26(336,-197.31) 27(336,-177.63) 28(336,-157.94) 29(336,-138.26) 30(336,-118.57) 31(336,-98.89) 32(336,-79.2) 33(336,-59.52) 34(336,-39.83) 35(336,-20.15) 36(336,-0.46)
  oval 9x59 smd: 13(59,-274) 14(78.69,-274) 15(98.37,-274) 16(118.06,-274) 17(137.74,-274) 18(157.43,-274) 19(177.11,-274) 20(196.8,-274) 21(216.48,-274) 22(236.17,-274) 23(255.85,-274) 24(275.54,-274) 37(275.54,56) 38(255.85,56) 39(236.17,56) 40(216.48,56) 41(196.8,56) 42(177.11,56) 43(157.43,56) 44(137.74,56) 45(118.06,56) 46(98.37,56) 47(78.69,56) 48(59,56)
  silkscreen extent -22,-248 312,40
SMA2E [mil]
  rect 60x87 smd: 1(0,0) 2(0,169)
  silkscreen extent -60,-67 62,179
SMA2I [mil]
  rect 76x79 smd: 1(0,0) 2(0,-181)
  silkscreen extent -58,-174 63,80
SMA2O [mil]
  rect 28x18 smd: 1(0,0) 2(0,88)
  silkscreen extent -26,-34 29,83
SMA2Q [mil]
  rect 89x93 smd: 1(0,0) 2(-180,0)
  silkscreen extent -225,-90 71,79
SMA2T [mil]
  rect 30x45 smd: 1(0,0) 2(0,-135)
  silkscreen extent -34,-122 38,48
SMA2U [mil]
  rect 124x98 smd: 1(0,0) 2(0,-297)
  silkscreen extent -121,-288 126,77
SMA2W [mil]
  rect 29x35 smd: 1(0,0) 2(0,-100)
  silkscreen extent -28,-87 30,43
SMA2Y [mil]
  rect 51x47 smd: 1(0,0) 2(0,80)
  silkscreen extent -56,-49 44,147
SMD4Q [mil]
  rect 39x46 smd: 1(0,0) 2(69,0) 3(69,-93) 4(0,-93)
  silkscreen extent -67,-129 86,38
SOP1E [mil]
  round 45 smd: 1(0,0)
SOP1P [mil]
  rect 57x185 smd: 1(0,0)
SOP1Q [mil]
  round 40 smd: 1(0,0)
SOP1R [mil]
  round 56 smd: 1(0,0)
SOP2E [mil]
  rect 76x78 smd: 1(0,0) 2(0,180)
  silkscreen extent -57,3 59,172
SOP2Q [mil]
  rect 116x152 smd: 1(0,0) 2(186,0)
  silkscreen extent -69,-82 254,89
SOP2R [mil]
  rect 124x104 smd: 1(0,0) 2(0,225)
  silkscreen extent -74,-9 77,236
SOP2W [mil]
  rect 50x130 smd: 1(0,0) 2(0,-202)
  silkscreen extent -134,-238 136,72
SOP3W [mil]
  rect 38x185 smd: 1(0,0) 2(80,0) 3(159,1)
SOP4E [mil]
  rect 54x29 smd: 1(0,0) 3(0,-118)
  rect 78x29 smd: 2(12,-59)
  rect 86x86 smd: 4(114,-59)
  silkscreen extent -21,-146 113,35
SOP4W [mil]
  rect 50x40 smd: 1(0,0) 3(0,-120)
  rect 75x40 smd: 2(12,-60)
  rect 69x79 smd: 4(149,-60)
  silkscreen extent 41,-151 143,31
SOP5Q [mil]
  rect 48x120 smd: 1(0,0) 2(-100,0) 3(-200,0) 4(-300,0) 5(-400,0)
  silkscreen extent -448,-82 49,70
SOP5W [mil]
  rect 48x120 smd: 1(0,0) 2(100,0) 3(200,0) 4(300,0) 5(400,0)
  silkscreen extent -49,-70 496,82
SOP6E [mil]
  rect 15x25 smd: 1(0,0) 2(25,0) 3(50,0) 4(50,71) 5(25,71) 6(0,71)
  silkscreen extent -17,12 71,61
SOP6Q [mil]
  rect 40x10 smd: 1(0,0) 2(0,25) 3(0,50) 4(-78,50) 5(-78,25) 6(-78,0)
  silkscreen extent -63,-19 -10,70
SOP6W [mil]
  rect 44x21 smd: 1(0,0) 2(0,-38) 3(0,-76) 4(97,-76) 5(97,-38) 6(97,0)
  silkscreen extent 15,-100 86,29
SOP8E [mil]
  oval 67x12 smd: 1(0,0) 2(0,-25.59) 3(0,-51.18) 4(0,-76.77) 5(172,-77) 6(172,-51.41) 7(172,-25.82) 8(172,-0.23)
  rect 68x88 smd: 9(85,-39)
  silkscreen extent -58,-99 147,23
SOP8Q [mil]
  rect 22x66 smd: 1(0,0) 2(-50,0) 3(-100,0) 4(-150,0) 5(-150,-210) 6(-100,-210) 7(-50,-210) 8(0,-210)
  silkscreen extent -175,-182 27,-23
SOP8Y [mil]
  oval 38x8 smd: 1(0,0) 2(0,19.68) 3(0,39.37) 4(0,59.06) 5(-126,59) 6(-126,39.32) 7(-126,19.63) 8(-126,-0.06)
  silkscreen extent -120,-36 18,78
SOP9Q [mil]
  rect 78x38 smd: 1(0,0) 2(0,-148) 3(0,-296) 4(0,-444) 5(0,-592) 6(955,-592) 7(955,-444) 8(955,-296) 9(955,-148)
  silkscreen extent -65,-731 992,137
SOP12Q [mil]
  rect 65x21 smd: 1(0,0) 2(0,50) 3(0,100) 4(0,150) 5(0,300) 6(0,350) 7(-215,350) 8(-215,300) 9(-215,150) 10(-215,100) 11(-215,50) 12(-215,0)
  silkscreen extent -198,-52 23,384
SOP16Q [mil]
  rect 72x22 smd: 1(0,0) 2(0,-50) 3(0,-100) 4(0,-150) 5(0,-200) 6(0,-250) 7(0,-300) 8(214,-300) 9(214,-250) 10(214,-200) 11(214,-150) 12(214,-100) 13(214,-50) 14(214,0)
  silkscreen extent -69,-326 195,31
SOT23-5Q [mil]
  rect 13x43 smd: 1(0,0) 2(26,0) 3(52,0) 4(52,73) 5(0,73)
  silkscreen extent -17,4 72,59
SOT23-5T [mil]
  rect 53x18 smd: 1(0,0) 2(0,37) 3(0,74) 4(-111,74) 5(-111,0)
  silkscreen extent -88,-22 -20,96
SOT23-5W [mil]
  rect 11x43 smd: 1(0,0) 2(26,0) 3(52,0) 4(52,87) 5(0,87)
  silkscreen extent -24,-44 77,78
SOT-23Q [mil]
  rect 36x48 smd: 1(0,0) 2(-80,0) 3(-40,-89)
  silkscreen extent -101,-79 22,53
SOT-23R [mil]
  rect 12x40 smd: 1(0,0) 2(40,0)
  rect 18x40 smd: 3(20,70)
  silkscreen extent -17,20 59,55
SOT-23W [mil]
  rect 20x40 smd: 1(0,0) 2(75,0) 3(38,89)
  silkscreen extent -37,-14 99,76

## Via types
v1: diameter 22, hole 11, TopLayer to BottomLayer, 1101 vias
v2: diameter 28, hole 14, TopLayer to BottomLayer, 79 vias

## Nets (pads, with @x,y where several pads share a name; then routed paths per layer and width w, separated by ;. In a path a pad name is that pad's centre, name@x,y a point inside that pad or via, vN(x,y) a via of type N, cw(c..) or ccw(c..) an arc to the next point about the centre after c; other vN are vias at no path point)
UnNamedNet1: J006.3 J105.11 | length 1496.8
  TopLayer w8: J006.3@2285,10624 2285,10523 v1(2316,10492)
  MidLayer1 w7: 1609,10773 1625,10773 2034,10773 2315,10492 v1(2316,10492)
  MidLayer4 w7: v1(2316,10492) 2316,10491 2297,10472 2297,10357 2251,10311 2251,10144 2354,10041 J105.11@2362,10041
UnNamedNet2: J006.2 J105.8 | length 1946.5
  TopLayer w8: J006.2@2364,10625 2364,10541 2400,10505 v1(2401,10505)
  MidLayer1 w7: 1609,10891 1686,10891 2126,10891 2397,10620 2397,10509 v1(2401,10505)
  MidLayer4 w7: J105.8@2362,9804 2371,9804 2487,9920 2487,10297 2424,10360 2424,10478 2401,10501 v1(2401,10505)
UnNamedNet3: J006.1 J105.9 R142.1 | length 1959.6
  TopLayer w8: J006.1@2444,10625 2444,10487 2480,10451 v1(2480,10450)
  MidLayer3 w7: 1616,10831 2104,10831 2386,10549 2413,10549 2445,10517 2445,10485 v1(2480,10450)
  BottomLayer w7: J105.9@2362,9883 2427,9883 2463,9919 2463,9938 2554,10029 2554,10125 2507,10172 2507,10292 2523,10308 2523,10408 2481,10450 v1(2480,10450)
UnNamedNet4: C117.1 C138.1 C181.2 C224.1 C225.1 C226.1 C228.1 C229.1 C230.1 C231.1 C234.1 C243.2 J105.2 L107.1 R105.2 T101.6 T101.9 | length 13954.3
  TopLayer w10: 3779.03,7634.15 cw(c3825,7644) 3806,7687
  TopLayer w12: 2473.39,9142 C181.2@2547,9142 ; 2474,8439 2474,8470 2508,8504 2508,8487 2494,8473 2490,8473 ; 2547,9073 C181.2@2547,9142 ; 2547,9198 C181.2@2547,9142 ; 2621.43,9142 C181.2@2547,9142 ; 3762,7574 3768,7574 3777,7583 3777,7624 3779,7626 ; 3769,7590 3769,7673 ; 3771,7661 3771,7669 3794,7692 3800,7692 ; 3807,7688 3811,7692 3871,7692 3871,7720 3857,7734 3857,7747
  TopLayer w45: 2621.43,9142 ccw(c2547,9142) 2621.43,9142
  MidLayer1 w10: 2490.01,9142 C181.2@2547,9142 ; 2547,9079 C181.2@2547,9142 ; 2547,9205 C181.2@2547,9142 ; 2603.99,9142 C181.2@2547,9142
  MidLayer1 w20: v1@3657,5444 3669,5449 3759,5432 3767,5246 3660,5236 3651,5281 3653,5420 3665,5444 3671,5436 3671,5241 3686,5435 T101.6@3745,5340 ; 3659,6816 3674,6649 3670,6827 ; T101.9@3672,6747 T101.9@3750,6732 ; T101.9@3737,6817 v1(3660,6840) 3661,6827 3650,6813 3651,6679 3661,6646 3670,6637 T101.9@3781,6703
  MidLayer2 w8: L107.1@2934,9236 2890,9236 2843,9283 2843,9318 v1(2844,9319) 2845,9318 3119,9318 v1(3120,9319) ; L107.1@3089,9232 3103,9246 3103,9298 3120,9315 v1(3120,9319) ; 3108,9313 3102,9313 3102,9302 3119,9319 v1(3120,9319)
  MidLayer2 w18: v1(2564,7709) v1(2619,7803) ; v1(2564,8232) v1(2618,8322) ; v1(2566,7803) v1(2617,7708) ; v1(2566,8324) v1(2616,8230) ; v1(2566,8768) v1(2619,8861) ; v1(2567,8862) v1(2620,8768) ; v1(3005,8493) v1(3058,8587) ; v1(3006,8586) v1(3055,8493) ; v1(3009,7977) v1(3065,8069) ; v1(3011,8068) v1(3062,7975) ; v1(3447,8239) v1(3498,8332) ; v1(3447,8332) v1(3497,8238) ; v1(3457,7730) v1(3510,7822) ; v1(3458,7822) v1(3509,7727) ; v1(3464,8801) C228.1@3514,8798 ; v1(3488,8754) C228.1@3514,8798 ; v1(3541,8753) C228.1@3514,8798
  MidLayer2 w19: T101.6@3729,5279 3724,5236 v1(3656,5235) v1(3644,5270) v1(3643,5305) v1(3644,5340) v1(3645,5373) v1(3644,5409) v1(3660,5441) 3667,5448 3766,5448 3670,5251 3659,5280 3661,5415 3678,5439 3673,5275 3695,5439 T101.6@3744,5340 ; T101.9@3743,6737 3676,6680 3683,6823 3651,6696 3667,6655 3664,6824 3644,6684 3669,6641 ; T101.9@3745,6725 3752,6650 3669,6641 ; 3669,6641 3755,6825 3669,6829 v1(3660,6840) v1(3644,6807) v1(3645,6772) v1(3645,6736) v1(3644,6702) v1(3644,6668) v1(3655,6633) 3669,6641
  MidLayer3 w15: J105.2@2362,9330 2462,9330 2485,9307 ; 2460,9142 C181.2@2547,9142 ; 2547,9065 C181.2@2547,9142 ; 2547,9235 C181.2@2547,9142 ; 2650,9142 C181.2@2547,9142
  MidLayer4 w20: v1(2564,7709) v1(2619,7803) ; v1(2564,8232) v1(2618,8322) ; v1(2566,7803) v1(2617,7708) ; v1(2566,8324) v1(2616,8230) ; v1(2566,8768) v1(2619,8861) ; v1(2567,8862) v1(2620,8768) ; v1(3005,8493) v1(3058,8587) ; v1(3006,8586) v1(3055,8493) ; v1(3009,7977) v1(3065,8069) ; v1(3011,8068) v1(3062,7975) ; v1(3447,8239) v1(3498,8332) ; v1(3447,8332) v1(3497,8238) ; v1(3457,7730) v1(3510,7822) ; v1(3458,7822) v1(3509,7727) ; v1(3464,8801) C228.1@3514,8798 ; v1(3488,8754) C228.1@3514,8798 ; v1(3541,8753) C228.1@3514,8798
  BottomLayer w25: v1@2566,7711 v1(2566,7803) ; v1@2566,8234 v1(2566,8324) ; v1@2567,8769 v1(2567,8862) ; v1@2618,8232 v1(2618,8322) ; v1@2619,7710 v1(2619,7803) ; v1@2619,8769 v1(2619,8861) ; v1@3006,8494 v1(3006,8586) ; v1@3011,7979 v1(3011,8068) ; C117.1@3050,7408 3044,7414 3044,7521 3040,7525 3039,7525 3033,7519 3033,7400 3043,7390 3061,7390 3061,7531 3058,7534 3017,7534 3016,7533 3016,7390 3022,7384 3055,7384 3058,7387 C117.1@3056,7387 ; v1@3058,8496 v1(3058,8587) ; v1@3065,7978 v1(3065,8069) ; v1(3447,8239) v1(3447,8332) ; v1@3458,7731 v1(3458,7822) ; v1(3464,8801) 3511,8801 C228.1@3514,8798 3541,8771 v1(3541,8753) ; v1(3488,8754) 3488,8780 C228.1@3515,8807 ; v1@3498,8240 v1(3498,8332) ; v1@3510,7728 v1(3510,7822)
  BottomLayer w30: 3666,6644 3666,6806 3681,6821 3691,6821 3702,6810 3702,6677 3679,6654 3679,6795 T101.9@3697,6813 ; T101.9@3724,6814 3724,6678 3701,6655 3730,6655 3733,6652 3733,6770 T101.9@3753,6790 ; T101.9@3747,6805 3717,6835 3664,6835 3648,6819 3648,6649 3661,6636 3748,6636 3750,6638 T101.9@3750,6637
  other v1: 3014,7533 3050,7533 2885,9318 3045,9318 2926,9319 2964,9319 3004,9319 3085,9319
UnNamedNet5: J101.13 R105.1 | length 95
  TopLayer w28: J101.13@2360,8547 2360,8542 2447,8542 R105.1@2447,8539
UnNamedNet6: J101.5 RT403.1 | length 2119.6
  TopLayer w12: v1(3815,7646) RT403.1@3884,7646
  MidLayer1 w7: J101.5@2360,7915 2395,7915 2423,7887 2423,7605 2767,7261 3153,7261 3531,7639 3808,7639 v1(3815,7646)